# Allegro board Debug Board Layout.brd
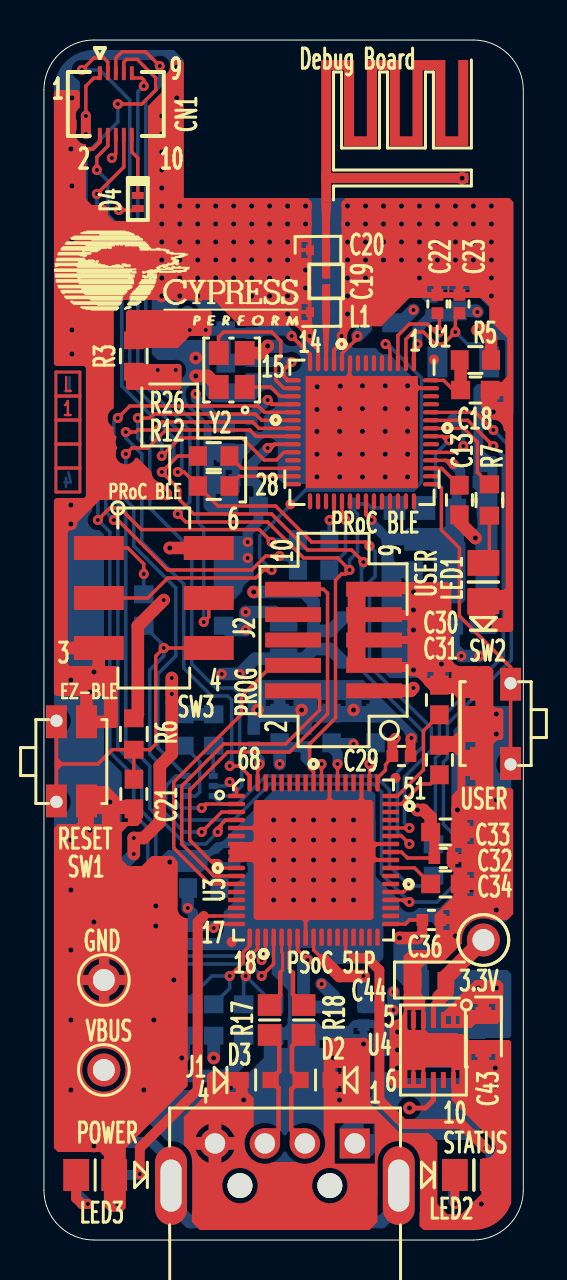
[diagram p0: board, top side]
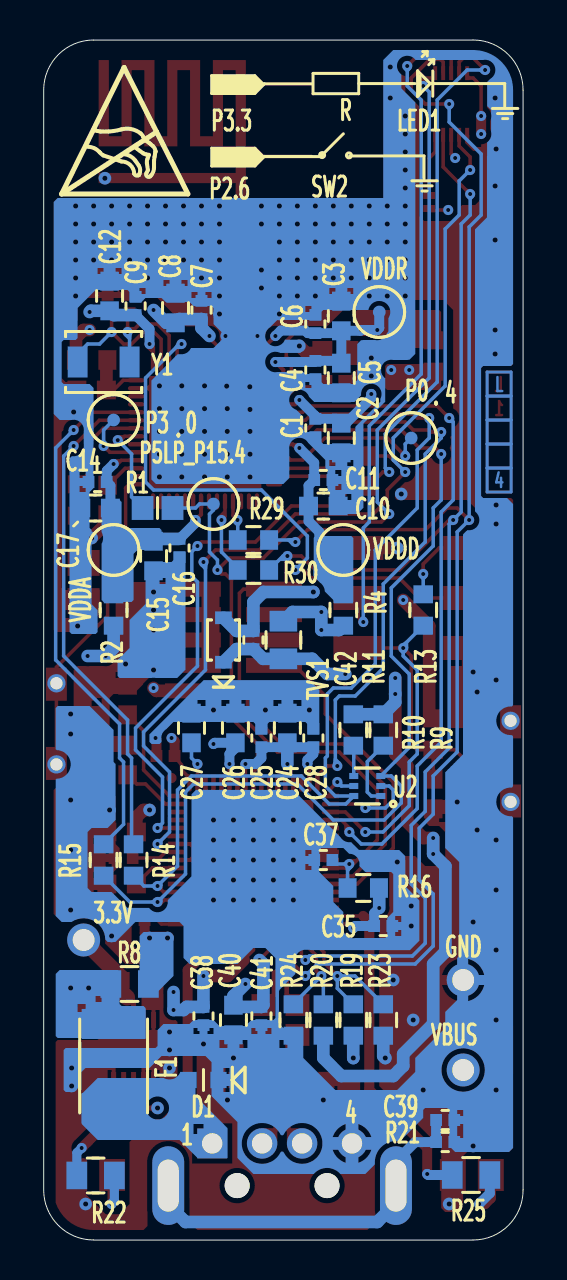
[diagram p1: board, bottom side, seen from below]

Outline 24 x 60 mm; copper layers: TOP, GND, POWER, BOTTOM. Coordinates in mm from the lower left corner of the outline.

## Design rules (mm)
net group DP1: nets DM_P DP_P
net group DP2: nets P5LP_DM P5LP_DP
net group POWER: nets GND_SIGNAL
nets with their own width: min track width 0.635; nets GND_EARTH1 P5LP_VCCD P5LP_VDD VBUS VCCD VDDA VDDD VDDR VREF VTARG

## Placement (name value [footprint] x y rotation side)
C1  0.1 uF  [CAPC1005X55N_0402_E]  10.4 40.6 270 bottom
C2  1.0 uF  [CAPC1608X90N_0603_E]  9.1 40.1 270 bottom
C3  1.0 uF  [CAPC1608X90N_0603_E]  9.1 46.2 90 bottom
C4  0.1 uF  [CAPC1005X55N_0402_E]  10.4 43.5 270 bottom
C5  1.0 uF  [CAPC1608X90N_0603_E]  9.1 43.1 270 bottom
C6  0.1 uF  [CAPC1005X55N_0402_E]  10.4 45.8 90 bottom
C7  0.1 uF  [CAPC1005X55N_0402_E]  16.1 46.5 90 bottom
C8  1.0 uF  [CAPC1608X90N_0603_E]  17.4 46.6 90 bottom
C9  0.1 uF  [CAPC1005X55N_0402_E]  19.4 46.7 90 bottom
C10  1.0 uF  [CAPC1608X90N_0603_E]  10 36.7 180 bottom
C11  0.1 uF  [CAPC1005X55N_0402_E]  10 38 180 bottom
C12  1.0 uF  [CAPC1608X90N_0603_E]  20.7 47.2 90 bottom
C13  1.0 uF  [CAPC1608X90N_0603_E]  20.8 37 270 top
C14  0.1 uF  [CAPC1005X55N_0402_E]  21.3 37.9 0 bottom
C15  1.0 uF  [CAPC1608X90N_0603_E]  18.5 34.2 270 bottom
C16  0.1 uF  [CAPC1005X55N_0402_E]  17.2 34.6 270 bottom
C17  1.0 uF  [CAPC1608X90N_0603_E]  21.4 36.6 0 bottom
C18  1.0 uF  [CAPC1608X90N_0603_E]  21.6 42.5 0 top
C19  1.2 pF  [L-0402-RF]  14.13 47.93 270 top
C20  1.2 pF  [C0402_RF_EDIT]  13.46 49.49 0 top
C21  100 pF  [CAPC1608X90N_0603_E]  4.5 22.3 270 top
C22  36 pF  [CAPC1005X55N_0402_E]  19.7 46.8 90 top
C23  18 pF  [CAPC1005X55N_0402_E]  20.8 46.8 90 top
C24  1.0 uF  [CAPC1608X90N_0603_E]  11.8 25.6 90 bottom
C25  0.1 uF  [CAPC1005X55N_0402_E]  13.1 25.1 90 bottom
C26  1.0 uF  [CAPC1608X90N_0603_E]  14.4 25.6 270 bottom
C27  1.0 uF  [CAPC1608X90N_0603_E]  16.6 25.6 270 bottom
C28  0.1 uF  [CAPC1005X55N_0402_E]  10.5 25.1 90 bottom
C29  0.1 uF  [CAPC1005X55N_0402_E]  17.9 24.2 0 top
C30  1.0 uF  [CAPC1608X90N_0603_E]  19.8 27 90 top
C31  1.0 uF  [CAPC1608X90N_0603_E]  19.8 24 90 top
C32  0.1 uF  [CAPC1005X55N_0402_E]  20 19.1 0 top
C33  1.0 uF  [CAPC1608X90N_0603_E]  20.1 20.4 0 top
C34  1.0 uF  [CAPC1608X90N_0603_E]  20.1 17.8 0 top
C35  0.1 uF  [CAPC1005X55N_0402_E]  7 15.7 180 bottom
C36  0.1 uF  [CAPC1005X55N_0402_E]  19.4 16 0 top
C37  0.1 uF  [CAPC1005X55N_0402_E]  10 19 0 bottom
C38  0.1 uF  [CAPC1005X55N_0402_E]  16 11.2 270 bottom
C39  0.01 uF  [CAPC1005X55N_0402_E]  3.9 6 180 bottom
C40  1.0 uF  [CAPC1608X90N_0603_E]  14.5 11 270 bottom
C41  0.1 uF  [CAPC1005X55N_0402_E]  13.1 11.2 270 bottom
C42  0.1 uF  [CAPC1005X55N_0402_E]  13.5 30 90 bottom
C43  10 uF  [CHIP_X1608_2_2]  22 10.4 270 top
C44  10 uF  [CHIP_X1608_2_2]  19.3 13 180 top
CN1  CON10A  [FLT_CONS_10_6PA]  3.6 56.8 0 top
D1  ESD 5VDC  [CR-LED0603]  16 8 180 bottom
D2  ESD 5VDC  [CR-LED0603]  13.6 8 0 top
D3  ESD 5VDC  [CR-LED0603]  10.6 8 180 top
D4  1SS417  [FLT_D0806_2_1PB]  4.7 51.9 270 top
F1  PTC Resettable Fuse  [FUSE_MF-MSMF050-2]  20.5 8.7 90 bottom
J1  USB A PLUG  [USB_A_90_PLUG_DIP]  12.06 0 0 top
J2  50MIL KEYED SMD  [FTSH-105-XX-X-DV-K]  14.5 30 90 top
L1  5.1nH  [C0402_RF_EDIT]  13.46 46.39 0 top
LED1  User LED Blue  [CR-LED0805]  22 32.9 90 top
LED2  Status LED Green  [CR-LED0805]  21.53 3.25 180 top
LED3  Power LED Red  [CR-LED0805]  2.56 3.25 180 top
NOREF  -  []  -251.18 -226.59 0 top
NOREF#2  -  []  0.4 45.6 0 top
NOREF#3  -  []  0 0 90 top
NOREF#4  -  []  0 0 0 top
NOREF#5  -  []  0 2.5 0 top
NOREF#6  -  [unnamed#2]  9.4 14.9 0 top
NOREF#7  -  []  180.62 -150.39 0 top
NOREF#8  -  []  16.8 52.3 0 top
NOREF#9  -  []  23.32 59.22 0 top
NOREF#10  -  [unnamed#2]  17.6 23.1 0 top
NOREF#11  -  [unnamed#2]  12.34 36.78 0 top
NOREF#12  -  [unnamed#2]  19.53 44.02 0 top
R1  Zero Ohm  [R-CR0603]  18.3 36.6 0 bottom
R2  Zero Ohm  [RESC1608X55N_0603_E]  20.5 31.5 270 bottom
R3  Zero Ohm  [RESC1608X55N_0603_E]  4.5 44.2 270 top
R4  Zero Ohm  [RESC1608X55N_0603_E]  9 31.5 270 bottom
R5  Zero Ohm  [RESC1608X55N_0603_E]  21.6 44 180 top
R6  4.7K  [RESC1608X55N_0603_E]  4.5 25.3 270 top
R7  820 ohm  [RESC1608X55N_0603_E]  22.3 37 270 top
R8  Zero Ohm  [RESC2012X70N_0805]  19.7 12.8 0 bottom
R9  2.2K  [RESC1608X55N_0603_E]  7 25.5 270 bottom
R10  2.2K  [RESC1608X55N_0603_E]  8.5 25.5 270 bottom
R11  Zero Ohm  [RESC2012X70N_0805]  12 30 90 bottom
R12  ZERO  [RESC1608X55N_0603_E]  8.5 37.7 0 top
R13  ZERO  [RESC1608X55N_0603_E]  5 31.5 90 bottom
R14  ZERO  [RESC1608X55N_0603_E]  19.5 19 90 bottom
R15  ZERO  [RESC1608X55N_0603_E]  21 19 90 bottom
R16  4.7K  [RESC1608X55N_0603_E]  8 17.6 0 bottom
R17  22E  [R-CR0603]  11.3 11 90 top
R18  22E  [R-CR0603]  13 11 90 top
R19  15K  [RESC1608X55N_0603_E]  8.5 11 90 bottom
R20  15K  [RESC1608X55N_0603_E]  10 11 90 bottom
R21  100K  [CAPC1005X55N_0402]  3.9 4.9 180 bottom
R22  820 ohm  [RESC2012X70N_0805]  21.4 3.23 180 bottom
R23  30K  [RESC1608X55N_0603_E]  7 11 270 bottom
R24  30K  [RESC1608X55N_0603_E]  11.5 11 270 bottom
R25  820 ohm  [RESC2012X70N_0805]  2.6 3.25 180 bottom
R26  ZERO  [RESC1608X55N_0603_E]  8.5 39.2 0 top
R29  ZERO  [RESC1608X55N_0603_E]  13.5 35 0 bottom
R30  ZERO  [RESC1608X55N_0603_E]  13.5 33.5 0 bottom
SW1  SW RA PUSH  [EVQ9P-SWITCH_1]  1.12 23.86 90 top
SW2  SW RA PUSH  [EVQ9P-SWITCH_1]  22.87 25.88 270 top
SW3  JS202011SCQN  [FLT_SW_6_4]  5.5 32.1 270 top
TP1  RED  [TP-43R_S]  20.5 41 180 bottom
TP2  RED  [TP-43R_S]  5.6 40.1 90 bottom
TP3  RED  [TP-43R_S]  20.5 34.5 180 bottom
TP4  RED  [TP-43R_S]  7.2 46.4 180 bottom
TP5  RED  [TP-43R_S]  9 34.5 180 bottom
TP6  VBUS  [TP-43-TH]  3 8.5 0 top
TP7  RED  [TP-43-TH]  3 13 0 top
TP8  RED  [TP-43-TH]  22 15 0 top
TP12  RED  [TP-43R_S]  15.5 36.8 90 bottom
TVS1  5V 350W  [SOD323]  15 30 90 bottom
U1  CYBL10162-56LQXI  [QFN40P700X700X60-57T570X570N]  15.92 40.39 180 top
U2  NTZD3152P  [SOT563]  7.8 22.7 0 bottom
U3  CY8C5868LTI-LP039 QFN68  [QFN68_8X8MM]  13.5 19 0 top
U4  MB39C022G  [SON_X_10_8TH]  19.5 9.5 180 top
Y1  32.768KHz  [Y-XTAL-CFS308]  21 43.9 0 bottom
Y2  24MHz  [ECX-2236-SMD_CRYSTAL-EDIT]  9.4 43.5 90 top

## Library data of the parts
C1 C4 C6 C7 C9 C11 C14 C16 C25 C28 C29 C32 C35-C38 C41 C42 = 0.1 uFd 0402: alternate symbols: (C-CC0402_A)
C2 C3 C5 C8 C10 C12 C13 C15 C17 C18 C21 C24 C26 C27 C30 C31 C33 C34 C40 = 1_0.0 uFd 0603 X5R 25V 10%: alternate symbols: (C-CC0603_A)
C19 C20 = CAP
C22 C23 = CAP NP
C39 = 0_0.01 uFd 0402 X7R
C43 C44 = GRM188
CN1 = DF40HC2_5-10DS-0_4V_PA
D1-D3 = ESD 5VDC 0603
D4 = 1SS417_FSC_PB
F1 = FUSE
J1 = USB A SMT Plug
J2 = 10 Pin Header 50mil Keyed SMD
L1 = INDUCTOR
LED1-LED3 = LED Green 0805
R1-R5 R8 R11 = 330 ohm 5% 0805_1
R6 R16 = 4.7K ohm 5% 0603: alternate symbols: (R-CR0603_A)
R7 R22 R25 = 330 ohm 5% 0805_0
R9 R10 = 2_0.2K ohm 5% 0603: alternate symbols: (R-CR0603_A)
R12-R15 R26 R29 R30 = Zero ohm 0603_2: alternate symbols: (R-CR0603_A)
R17 R18 = 24 ohm 5% 0603 _0
R19 R20 R23 R24 = RESISTOR
R21 = 100K ohm 5% 0402: alternate symbols: (R-CR0402_A)
SW1 SW2 = Switch RA Pushbutton_0
SW3 = JS202011SCQN
TP1-TP8 TP12 = TEST_POINT
TVS1 = TVS 5V SOD-323_0
U1 = PSoC_BLE_2
U2 = FET DUAL P-CH 20V 430mA SOT-563
U3 = CY8C5667LTI-LP008 QFN68
U4 = MB39C022G
Y1 = 32_0.768KHz XTAL_5P
Y2 = ZTA_14

## Footprints (pads in the part's own frame, mm; a bottom-side part is the same pattern mirrored in y, then rotated)
C0402_RF_EDIT
  rect 0.406x0.5 smd: 1(-0.145,0) 2(0.664,0)
CAPC1005X55N_0402
  rect 0.59x0.6 smd: 1(-0.455,0) 2(0.455,0)
CAPC1005X55N_0402_E
  rect 0.59x0.6 smd: 1(-0.455,0) 2(0.455,0)
CAPC1608X90N_0603_E
  rect 0.95x0.93 smd: 1(-0.74,0) 2(0.74,0)
CHIP_X1608_2_2
  rect 0.85x0.8 smd: 1(-0.825,0) 2(0.825,0)
CR-LED0603
  rect 0.813x0.813 smd: 1(-0.749,0) 2(0.749,0)
CR-LED0805
  rect 1.295x1.6 smd: 1(-0.952,0) 2(0.952,0)
ECX-2236-SMD_CRYSTAL-EDIT
  rect 1.2x1 smd: 1(-0.85,-0.65) 2(0.85,-0.65) 3(0.85,0.65) 4(-0.85,0.65)
EVQ9P-SWITCH_1
  round 0.914 hole 0.61: (-1.953,0.492) (2.103,0.492)
  rect 1.65x1.05 smd: 1(2.055,0.492) 2(2.055,-1.016) 3(-1.905,0.492) 4(-1.905,-1.016)
FLT_CONS_10_6PA
  rect 0.2x0.7 smd: 1(-0.8,1.54) 2(-0.8,-1.54) 3(-0.4,1.54) 4(-0.4,-1.54) 5(0,1.54) 6(0,-1.54) 7(0.4,1.54) 8(0.4,-1.54) 9(0.8,1.54) 10(0.8,-1.54)
FLT_D0806_2_1PB
  rect 0.35x0.6 smd: 1(-0.425,0) 2(0.425,0)
FLT_SW_6_4
  rect 1.2x2.5 smd: 1(-2.5,-2.75) 2(0,-2.75) 3(2.5,-2.75) 4(-2.5,2.75) 5(0,2.75) 6(2.5,2.75)
FTSH-105-XX-X-DV-K
  rect 0.749x2.799 smd: 1(-2.54,-2.029) 2(-2.54,2.029) 3(-1.27,-2.029) 4(-1.27,2.029) 5(0,-2.029) 6(0,2.029) 7(1.27,-2.029) 8(1.27,2.029) 9(2.54,-2.029) 10(2.54,2.029)
FUSE_MF-MSMF050-2
  rect 1.501x3.2 smd: 1(-2.101,0) 2(2.101,0)
L-0402-RF
  rect 0.5x0.406 smd: 1(-0.4,0) 2(0.4,0)
QFN40P700X700X60-57T570X570N
  oval 0.22x0.81 smd: 1(-2.6,-3.455) 2(-2.2,-3.455) 3(-1.8,-3.455) 4(-1.4,-3.455) 5(-1,-3.455) 6(-0.6,-3.455) 7(-0.2,-3.455) 8(0.2,-3.455) 9(0.6,-3.455) 10(1,-3.455) 11(1.4,-3.455) 12(1.8,-3.455) 13(2.2,-3.455) 14(2.6,-3.455) 29(2.6,3.455) 30(2.2,3.455) 31(1.8,3.455) 32(1.4,3.455) 33(1,3.455) 34(0.6,3.455) 35(0.2,3.455) 36(-0.2,3.455) 37(-0.6,3.455) 38(-1,3.455) 39(-1.4,3.455) 40(-1.8,3.455) 41(-2.2,3.455) 42(-2.6,3.455)
  oval 0.81x0.22 smd: 15(3.455,-2.6) 16(3.455,-2.2) 17(3.455,-1.8) 18(3.455,-1.4) 19(3.455,-1) 20(3.455,-0.6) 21(3.455,-0.2) 22(3.455,0.2) 23(3.455,0.6) 24(3.455,1) 25(3.455,1.4) 26(3.455,1.8) 27(3.455,2.2) 28(3.455,2.6) 43(-3.455,2.6) 44(-3.455,2.2) 45(-3.455,1.8) 46(-3.455,1.4) 47(-3.455,1) 48(-3.455,0.6) 49(-3.455,0.2) 50(-3.455,-0.2) 51(-3.455,-0.6) 52(-3.455,-1) 53(-3.455,-1.4) 54(-3.455,-1.8) 55(-3.455,-2.2) 56(-3.455,-2.6)
  rect 5.6x5.6 smd: 57(0,0)
QFN68_8X8MM
  custom 0.865x0.229 smd: 1(-3.851,3.2) 2(-3.851,2.799) 3(-3.851,2.4) 4(-3.851,1.999) 5(-3.851,1.6) 6(-3.851,1.199) 7(-3.851,0.8) 8(-3.851,0.399) 9(-3.851,0) 10(-3.851,-0.399) 11(-3.851,-0.8) 12(-3.851,-1.199) 13(-3.851,-1.6) 14(-3.851,-1.999) 15(-3.851,-2.4) 16(-3.851,-2.799) 17(-3.851,-3.2) 35(3.851,-3.2) 36(3.851,-2.799) 37(3.851,-2.4) 38(3.851,-1.999) 39(3.851,-1.6) 40(3.851,-1.199) 41(3.851,-0.8) 42(3.851,-0.399) 43(3.851,0) 44(3.851,0.399) 45(3.851,0.8) 46(3.851,1.199) 47(3.851,1.6) 48(3.851,1.999) 49(3.851,2.4) 50(3.851,2.799) 51(3.851,3.2)
  custom 0.229x0.865 smd: 18(-3.2,-3.851) 19(-2.799,-3.851) 20(-2.4,-3.851) 21(-1.999,-3.851) 22(-1.6,-3.851) 23(-1.199,-3.851) 24(-0.8,-3.851) 25(-0.399,-3.851) 26(0,-3.851) 27(0.399,-3.851) 28(0.8,-3.851) 29(1.199,-3.851) 30(1.6,-3.851) 31(1.999,-3.851) 32(2.4,-3.851) 33(2.799,-3.851) 34(3.2,-3.851) 52(3.2,3.851) 53(2.799,3.851) 54(2.4,3.851) 55(1.999,3.851) 56(1.6,3.851) 57(1.199,3.851) 58(0.8,3.851) 59(0.399,3.851) 60(0,3.851) 61(-0.399,3.851) 62(-0.8,3.851) 63(-1.199,3.851) 64(-1.6,3.851) 65(-1.999,3.851) 66(-2.4,3.851) 67(-2.799,3.851) 68(-3.2,3.851)
  rect 5.601x5.601 smd: 69(0,0)
R-CR0603
  rect 1.092x1.194 smd: 1(-0.749,0) 2(0.749,0)
RESC1608X55N_0603_E
  rect 0.9x0.98 smd: 1(-0.785,0) 2(0.785,0)
RESC2012X70N_0805
  rect 1.04x1.38 smd: 1(-0.94,0) 2(0.94,0)
SOD323
  rect 0.635x0.838 smd: 1(-1.112,0) 2(1.112,0)
SON_X_10_8TH
  rect 0.25x0.8 smd: 1(-1,-1.5) 2(-0.5,-1.5) 3(0,-1.5) 4(0.5,-1.5) 5(1,-1.5) 6(1,1.5) 7(0.5,1.5) 8(0,1.5) 9(-0.5,1.5) 10(-1,1.5)
  rect 2.4x1.7 smd: 11(0,0)
SOT563
  rect 0.457x0.305 smd: 1(-0.676,0.5) 2(-0.676,0) 3(-0.676,-0.5) 4(0.676,-0.5) 5(0.676,0) 6(0.676,0.5)
TP-43-TH
  round 1.651 hole 1.092: 1(0,0)
TP-43R_S
  round 0.635 smd: 1(0,0)
unnamed#2
  round 0.508 smd: (0,0)
USB_A_90_PLUG_DIP
  round 1.25 hole 1.25 unplated: (-2.25,2.72) (2.25,2.72)
  rect 1.5x1.5 hole 1.016: 1(3.5,4.829)
  round 1.524 hole 1.016: 2(1.001,4.829) 3(-1.001,4.829) 4(-3.5,4.829)
  oval 1.6x3.937 hole 1.05x2.6: 5(-5.7,2.72) 6(5.7,2.72)
Y-XTAL-CFS308
  rect 1x1.55 smd: 1(-1.3,0) 2(1.3,0)

## Nets
GND_EARTH1: C39.1 J1.5(S1) J1.6(S2) R21.1
GND_SIGNAL: C1.2 C2.2 C3.2 C4.2 C5.2 C6.2 C7.2 C8.2 C9.2 C10.2 C11.2 C12.2 C13.2 C14.2 C15.2 C16.2 C17.2 C18.2 C19.1 C20.1 C20.2 C21.2 C22.2 C23.2 C24.2 C25.2 C26.1 C27.1 C28.2 C29.2 C30.2 C31.2 C32.2 C33.2 C34.2 C35.2 C36.2 C37.2 C38.2 C39.2 C40.2 C41.2 C42.2 C43.2 C44.2 CN1.2 D1.2(ANODE) D2.2(ANODE) D3.2(ANODE) J1.4(GND) J2.3 J2.5 J2.7 J2.9 L1.1 LED1.1(K) LED2.1(K) LED3.1(K) R21.2 R23.2 R24.2 SW1.2 SW1.4 SW2.2 SW2.4 SW3.3 SW3.4 TP7.1 TVS1.2(A) U1.9(VSSD) U1.11(GANT1) U1.13(GANT2) U1.55(VSSA) U1.57(EPAD) U3.5(VSSB) U3.7(VBOOST) U3.8(VBAT) U3.9(VSSD#9) U3.25(VSSD#25) U3.43(VSSA) U3.45(VSSD#45) U3.54(P0_5) U3.58(VSSD#58) U3.69(EPAD) U4.4 U4.5 U4.6 U4.7 U4.10 U4.11 Y2.2 Y2.4
VBUS: C43.1 F1.2 R8.2 R19.1 TP6.1 U4.1 U4.2 U4.8
VCCD: C18.1 R5.2 U1.56(VCCD)
VDDA: C14.1 C15.1 C16.1 C17.1 R2.1 TP3.1 U1.36(VDDA#36) U1.46(VDDA#46)
VDDD: C9.1 C10.1 C11.1 C12.1 R4.1 R5.1 R6.1 TP5.1 U1.1(VDDD#1) U1.23(VDDD#23)
VDDR: C1.1 C2.1 C3.1 C4.1 C5.1 C6.1 C7.1 C8.1 R3.1 TP4.1 U1.10(VDDR#10) U1.14(VDDR#14) U1.15(VDDR#15) U1.18(VDDR#18)
BLE_BIND: SW2.1 SW2.3 U1.43(P2.6)
BLE_P3_2: R1.2 U1.49(P3.2)
BLE_RX: R29.2 U1.32(P1.4)
BLE_STATUS: R7.1 U1.50(P3.3)
BLE_TEST1: TP1.1 U1.47(P3.0)
BLE_TEST2: TP2.1 U1.24(P0.4)
BLE_TX: R30.2 U1.33(P1.5)
BLE_XRES: SW3.2 U1.4(XRES)
DM_P: R18.2 U3.23(P15_7 DM)
DP_P: R17.2 U3.22(P15_6 DP)
EXTRA: CN1.9 R1.1 TP12.1 U3.60(P15_4)
EZ_VDD: C44.1 CN1.1 CN1.6 D4.2 R2.2 R3.2 R4.2 R11.2 TP8.1 U4.3
EZ_XRES: CN1.5 SW3.5
P5LP0_0: U3.48(P0_0)
P5LP0_1: U3.49(P0_1)
P5LP0_2: C31.1 U3.50(P0_2)
P5LP0_3: C30.1 U3.51(P0_3)
P5LP0_4: C27.2 U3.53(P0_4)
P5LP1_2: U3.13(P1_2)
P5LP1_6: R19.2 R23.1 U3.18(P1_6)
P5LP1_7: R20.2 R24.1 U3.19(P1_7)
P5LP2_5: U1.21(P0.2) U3.68(P2_5)
P5LP2_6: U2.5(G2) U3.1(P2_6)
P5LP2_7: U2.2(G1) U3.2(P2_7)
P5LP3_0: U3.29(P3_0)
P5LP3_1: R22.1 U3.30(P3_1)
P5LP3_4: U3.33(P3_4)
P5LP3_5: U3.34(P3_5)
P5LP3_6: U3.36(P3_6)
P5LP3_7: U3.37(P3_7)
P5LP12_0: R15.1 U1.22(P0.3) U2.3(D2) U3.38(SIO, I2C1_SCL P12_0)
P5LP12_1: R14.1 U1.20(P0.1) U2.6(D1) U3.39(SIO, I2C1_SDA P12_1)
P5LP12_2: CN1.4 R26.1 U3.46(SIO_P12_2)
P5LP12_3: CN1.3 R12.1 U3.47(SIO_P12_3)
P5LP12_4: C21.1 R6.2 R13.1 SW1.1 SW1.3 SW3.6 U3.3(P12_4 I2C0_SCL, SIO)
P5LP12_5: U1.19(P0.0) U3.4(P12_5 I2C0_SDA, SIO)
P5LP12_6: CN1.8 R30.1 U3.20(P12_6_SIO)
P5LP12_7: CN1.7 R29.1 U3.21(P12_7_SIO)
P5LP_DM: D2.1(CATHODE) J1.2(DM) R18.1
P5LP_DP: D3.1(CATHODE) J1.3(DP) R17.1
P5LP_POWER: R25.1 U3.16(P1_5)
P5LP_SWDCLK: J2.4 U3.12(P1_1)
P5LP_SWDIO: J2.2 U3.11(P1_0)
P5LP_SWO: U3.14(P1_3)
P5LP_VCCD: C26.2 C38.1 U3.26(VCCD#26) U3.57(VCCD#57)
P5LP_VDD: C24.1 C25.1 C28.1 C29.1 C32.1 C33.1 C35.1 C36.1 C40.1 C41.1 R8.1 R16.1 U3.17(VDDIO1) U3.24(VDDD#24) U3.35(VDDIO3) U3.44(VDDA) U3.52(VDDIO0) U3.59(VDDD#59) U3.67(VDDIO2)
P5LP_XRES: C37.1 J2.10 R16.2 U3.10(XRES)
SCL: R15.2 U1.52(P3.5)
SDA: R14.2 U1.51(P3.4)
SWDCLK: R12.2 U1.27(P0.7)
SWDIO: R26.2 U1.26(P0.6)
VREF: C13.1 U1.45(VREF)
VTARG: C42.1 J2.1 R9.1 R10.1 R11.1 R20.1 TVS1.1(K)
XRES: R13.2 SW3.1
XTAL24I: U1.16(XTAL24I) Y2.3
XTAL24O: U1.17(XTAL24O) Y2.1
XTAL32I: C22.1 U1.3(XTAL32I/P6.1) Y1.1
XTAL32O: C23.1 U1.2(XTAL32O/P6.0) Y1.2
N16838351: LED1.2(A) R7.2
N16850094: LED2.2(A) R22.2
N16851895: D1.1(CATHODE) F1.1 J1.1(VBUS)
N16852479: LED3.2(A) R25.2
N16886366: C34.1 U3.42(VCCA)
N16934357: C19.2 L1.2 U1.12(ANT)
N16992889: CN1.10 D4.1
N168501551: R9.2 U2.1(S1)
N168501631: R10.2 U2.4(S2)

Pads without a net: J2 6 8; U1 5 6 7 8 25 28 29 30 31 34 35 37 38 39 40 41 42 44 48 53 54; U3 6 15 27 28 31 32 40 41 55 56 61 62 63 64 65 66; U4 9

## Via types
v1: diameter 0.508, hole 0.203, TOP to BOTTOM, 103 vias
v2: diameter 0.635, hole 0.254, TOP to BOTTOM, 221 vias

## Routing (per net, layer and track width the routed paths; a pad name or vN(x,y) marks a point on that pad's centre or on a via; arc(x,y) is an arc through that point)
GND_EARTH1: length 18.7
  BOTTOM w0.5: 4.36,6 4.36,4.9 5.41,4.89
  BOTTOM w0.508: J1.5 6.36,3.94 5.41,4.89
  BOTTOM w0.635: J1.5 6.36,1.83 7.3,0.9 16.9,0.9 17.76,1.76 J1.6
GND_SIGNAL: length 28
  TOP w0.2: CN1.2 2.8,54.9 2.45,54.55 v2(1.35,54.55) ; 13.57,44.66 13.3,44.94 v1(13.3,45.2) ; 14.52,43.94 U1.11 ; 13.72,43.94 U1.13 ; 14.66,44.64 14.9,44.87 v1(14.9,45.2)
  TOP w0.203: 13.57,44.66 13.72,44.52 13.72,43.94 ; 14.52,43.94 14.52,44.5 14.66,44.64
  TOP w0.5: v1(18.4,25.1) 18.36,25.05 18.36,24.2
  TOP w0.635: v2(21.6,35.1) 20.8,35.9 C13.2 ; Y2.2 10.85,44.35 v2(11.2,44.7) ; SW3.4 v2(6.3,34.6) ; C18.2 22.34,41.56 v2(22.5,41.4) ; Y2.4 8.2,43.2 v2(7.6,43.2) ; 1.1,29.6 SW3.3 2.75,28.65 v2(2.5,28.4) ; v2(2.3,27.4) 2.13,27.23 SW1.2 3.21,25.91 3.3,26 ; LED3.1 3.52,1.98 v2(3.7,1.8)
  BOTTOM w0.635: v2(6.9,9.1) 7,9.2 R23.2 ; TVS1.2 14.34,30.45 C42.2 13.5,31.9 13,32.4 v2(10.5,32.4)
  vias: v2(1.4,57.1) v2(1.4,52.7) v2(1.4,50) v2(1.4,45.5) v2(1.4,44.3) v2(1.35,36.75) v2(1.35,35.8) v2(1.35,28) v2(1.35,20) v2(1.35,17.5) v2(1.35,14.5) v2(1.35,11) v2(1.35,7.5) v2(2.3,20.5) v2(2.5,15.9) v2(2.5,4.7) v2(3.3,21.9) v2(5,7.5) v2(5.5,11) v2(5.6,16.7) v2(5.6,15.7) v2(5.9,56.2) v2(5.9,55.3) v2(5.9,54.4) v2(5.9,53.5) v2(5.9,52.6) v2(5.9,51.7) v2(5.9,50.8) v2(5.9,49.9) v2(5.9,49) v2(5.9,48.1) v2(5.9,47.2) v2(6.1,37.3) v2(6.3,18.9) v2(6.5,13) v2(6.65,58.65) v2(6.65,57.1) v2(6.8,51.7) v2(6.8,50.8) v2(6.8,49.9) v2(6.8,49) v2(6.8,48.1) v2(6.8,47.2) v2(7.6,44.1) v2(7.7,51.7) v2(7.7,50.8) v2(7.7,49.9) v2(7.7,49) v2(7.7,48.1) v2(7.7,47.2) v2(8.6,51.7) v2(8.6,50.8) v2(8.6,49.9) v2(8.6,49) v2(8.6,48.1) v2(9.5,51.7) v2(9.5,50.8) v2(9.5,49.9) v2(9.5,49) v2(9.5,48.1) v2(10,7) v2(10.4,51.7) v2(10.4,50.8) v2(10.4,49.9) v2(10.4,49) v2(10.4,48.1) v2(10.4,47.2) v2(10.7,26.5) v2(11.3,51.7) v2(11.3,50.8) v2(11.3,49.9) v2(11.3,49) v2(11.3,48.1) v2(11.3,47.2) v2(11.5,21) v2(11.5,20) v2(11.5,19) v2(11.5,18) v2(11.5,17) v2(12.2,51.7) v2(12.2,50.8) v2(12.2,49.9) v2(12.2,49) v2(12.2,48.1) v2(12.2,47.2) v2(12.2,46.3) v2(12.5,21) v2(12.5,20) v2(12.5,19) v2(12.5,18) v2(12.5,17) v2(12.9,26.5) v2(13.1,51.7) v2(13.1,50.8) v2(13.1,48.5) v2(13.1,47.6) v2(13.5,21) v2(13.5,20) v2(13.5,19) v2(13.5,18) v2(13.5,17) v2(13.68,42.66) v2(13.67,41.53) v2(13.67,40.43) v2(13.67,39.29) v2(13.67,38.15) v2(14.5,21) v2(14.5,20) v2(14.5,19) v2(14.5,18) v2(14.5,17) v2(14.5,9.1) v2(14.84,42.69) v2(14.81,41.57) v2(14.81,40.43) v2(14.81,39.29) v2(14.81,38.15) v2(14.8,7) v2(15.2,51.7) v2(15.2,50.8) v2(15.2,49.9) v2(15.2,49) v2(15.2,48.1) v2(15.2,47.2) v2(15.2,46.3) v2(15.5,26.5) v2(15.5,21) v2(15.5,20) v2(15.5,19) v2(15.5,18) v2(15.5,17) v2(15.95,42.71) v2(15.95,41.57) v2(15.95,40.43) v2(15.95,39.29) v2(15.95,38.15) v2(16,9.8) v2(16.1,51.7) v2(16.1,50.8) v2(16.1,49.9) v2(16.1,49) v2(16.1,48.1) v2(17,51.7) v2(17,50.8) v2(17,49.9) v2(17,49) v2(17.09,42.71) v2(17.09,41.57) v2(17.09,40.43) v2(17.09,39.29) v2(17.09,38.15) v2(17.7,10.4) v2(17.7,9.5) v2(17.7,8.6) v2(17.9,51.7) v2(17.9,50.8) v2(17.9,49.9) v2(17.9,49) v2(18.21,42.71) v2(18.21,41.57) v2(18.21,40.43) v2(18.21,39.29) v2(18.21,38.15) v2(18.5,32.4) v2(18.5,31.5) v2(18.5,30.5) v2(18.5,28.5) v2(18.8,51.7) v2(18.8,50.8) v2(18.8,49.9) v2(18.8,49) v2(18.8,48.1) v2(19.7,51.7) v2(19.7,50.8) v2(19.7,49.9) v2(19.7,49) v2(19.9,28.8) v2(20.6,51.7) v2(20.6,50.8) v2(20.6,49.9) v2(20.6,49) v2(20.6,15.2) v2(20.7,21.5) v2(20.94,53.09) v2(21.5,51.7) v2(21.5,50.8) v2(21.5,49.9) v2(21.5,49) v2(21.9,1.8) v2(22.3,30.7) v2(22.4,51.7) v2(22.4,50.8) v2(22.4,49.9) v2(22.4,49) v2(22.4,48.1) v2(22.4,47.2) v2(22.65,26.3) v2(22.65,25.3) v2(22.65,16.5) v2(22.6,8.6) v2(22.6,7.7) v2(22.65,22) v2(22.65,19.5)
VBUS: length 3.5
  TOP w0.25: v2(18.3,6.6) 19.1,6.6 19.5,7 U4.8
  BOTTOM w0.635: R19.1 v2(8.5,9.1)
  vias: v2(21.75,12.6) v2(22.65,12.6)
VCCD: length 3.2
  TOP w0.178: C18.1 20.5,42.5 20.01,42.99 19.38,42.99
  TOP w0.635: C18.1 20.86,43.95 R5.2
VDDA: length 7.3
  TOP w0.178: 19.38,38.99 20.11,38.99 20.3,38.8 v1(20.5,38.8)
  TOP w0.203: U1.36 16.12,36.28 v1(16.4,36)
  BOTTOM w0.5: C17.1 20.66,37.72 20.84,37.9 20.84,38.45 v1(20.5,38.8) ; C16.1 16.4,35.85 v1(16.4,36)
  BOTTOM w0.635: C16.1 18.39,35.05 C15.1
VDDD: length 20.4
  TOP w0.2: U1.23 11.54,39.79 11.35,39.6 v1(11.2,39.6)
  TOP w0.203: U1.1 18.52,44.62 v1(18.7,44.8)
  TOP w0.635: v1(21.7,45.5) 22,45.5 22.39,45.12 R5.1 ; v1(6,32) 4.7,30.7 4.7,26.29 R6.1
  BOTTOM w0.5: v1(11.2,39.6) 10.46,38.85 C11.1 10.74,37.72 C10.1 10.74,35.94 10.2,35.4 v1(10.2,34.9) ; 19.4,46.24 18.7,45.55 v1(18.7,44.8)
  BOTTOM w0.635: 19.4,46.24 20.48,46.24 C12.1 21.64,46.46 v1(21.7,46.4)
  vias: v1(10.2,34.1)
VDDR: length 26.1
  TOP w0.178: v1(15.7,45.2) 15.7,45.1 14.92,44.32 U1.10
  TOP w0.2: U1.15 12.21,42.99 12,43.2 12,43.5 v1(12.4,43.9)
  TOP w0.203: U1.18 11.41,41.79 v1(11.2,42) ; U1.14 13.32,44.28 v1(12.4,45.2)
  BOTTOM w0.5: v1(7.6,42.3) 7.6,42.1 8.86,40.84 C2.1 9.31,41.05 C1.1 10.4,41.2 v1(11.2,42) ; v1(12.4,43.9) 10.46,43.9 C4.1 9.21,43.95 C5.1 C3.1 ; C3.1 8.14,45.46 v1(8.1,45.5) v1(7.3,45.5) 7.2,45.6 TP4.1 ; C3.1 9.21,45.34 C6.1 10.78,45.34 10.9,45.47 12.13,45.47 v1(12.4,45.2)
  BOTTOM w0.635: v1(15.7,45.2) 16.1,45.6 C7.1 17.21,46.05 C8.1 17.86,45.86 v1(18.5,46.5)
BLE_BIND: length 15.8
  TOP w0.178: 19.38,37.79 19.71,37.79 19.9,37.6 19.9,35.5 20.8,34.6 20.8,31.2 23.36,28.64 SW2.3 SW2.1
BLE_P3_2: length 4.9
  TOP w0.178: 19.38,40.19 19.95,40.19 20.14,39.99 v1(20.29,39.99)
  BOTTOM w0.178: v1(20.29,39.99) 19.6,39.3 19.6,37.15 R1.2
BLE_RX: length 2
  TOP w0.178: U1.32 14.52,36.22 v1(14.3,36)
  BOTTOM w0.178: R29.2 14.29,35.98 v1(14.3,36)
BLE_STATUS: length 5
  TOP w0.178: R7.1 21.7,38.38 21.7,39.9 21.01,40.59 19.38,40.59
BLE_TEST1: length 3.3
  TOP w0.178: v1(21,39.7) 20.69,39.39 19.38,39.39
  BOTTOM w0.178: TP1.1 21,40.5 v1(21,39.7)
BLE_TEST2: length 8.6
  TOP w0.178: v1(5.9,39.2) 6.8,40.1 9.93,40.1 11.03,39 11.64,39 12.02,39.39 U1.24
  BOTTOM w0.178: v1(5.9,39.2) 5.9,39.8 TP2.1
BLE_TX: length 3.8
  TOP w0.178: v1(15.1,36) 14.92,36.18 U1.33
  BOTTOM w0.178: R30.2 14.29,33.59 15.1,34.4 v1(15.1,36)
BLE_XRES: length 29.2
  TOP w0.178: U1.4 17.32,44.58 v1(17.1,44.8) ; v1(11.4,33.5) 11,33.5 10.6,33.1 6.2,33.1 5.2,32.1 SW3.2
  BOTTOM w0.178: v1(11.4,33.5) 10.8,34.1 10.8,35.2 13.1,37.5 18.5,37.5 18.9,37.9 18.9,43.1 17.2,44.8 v1(17.1,44.8)
DM_P: length 3.7
  TOP w0.152: 12.47,13.38 12.25,13.59 12.25,14.36 12.3,14.4 U3.23
  TOP w0.229: R18.2 12.47,12.28 12.47,13.38
DP_P: length 3.7
  TOP w0.152: 11.83,13.38 11.95,13.49 11.95,14.36 11.9,14.4 U3.22
  TOP w0.229: 11.83,13.38 11.83,12.28 R17.2
EXTRA: length 51.1
  TOP w0.178: CN1.9 4.4,58.2 4.5,58.1 4.9,58.1 5,58 v1(5,57.7) ; v1(6.7,36.3) 7.1,35.9 11.2,35.9 13,34.1 14.7,34.1 v1(15.3,33.5) 15.1,33.3 14.9,33.3 14.6,33 14.6,26.1 13.3,24.8 13.3,23.6 13.5,23.4 U3.60
  BOTTOM w0.178: v1(5,57.7) 4.7,57.4 4.7,43.1 7.3,40.5 7.3,36.9 v1(6.7,36.3) ; v1(15.3,33.5) 15.3,34 15.7,34.4 15.7,36.3 15.5,36.5 TP12.1 16.2,36.8 16.4,36.6 R1.1
EZ_VDD: length 82.3
  TOP w0.178: v1(2.1,56.2) 2.1,57.7 2.5,58.1 2.7,58.1 2.8,58.2 CN1.1 ; CN1.6 3.6,54.3 v1(3.4,54.1) ; v1(3.75,51.5) 4.3,51.5 4.33,51.48 D4.2
  TOP w0.25: U4.3 19.5,11.8 19.82,12.12
  TOP w0.5: v1(2.1,55.3) v1(2.1,56.2)
  TOP w0.8: 19.82,12.12 20.12,12.43 C44.1 20.12,13.12 TP8.1
  POWER w0.8: 2.7,43.5 v1(5.7,43.5) v1(6.6,43.5) ; 2.7,43.5 2.7,50.45 v1(3.75,51.5) 3.75,53.75 v1(3.4,54.1) 2.2,55.3 v1(2.1,55.3) v1(2.1,56.2) ; 2.7,43.5 2.7,38.7 4.5,36.9 4.5,34.7 4,34.2 4,32.4 5.9,30.5 6.5,30.5 7,30 8.4,30 8.9,30.5 v1(10.1,30.5) ; v1(10.1,30.5) 16.9,30.5 17.9,29.5 19,29.5 19.3,29.8 20.3,29.8 v1(20.9,29.2) v1(21.8,29.2) 21.8,28 21.7,27.9 21.7,15.3 TP8.1 ; v1(10.1,30.5) v1(10.1,31.4)
  BOTTOM w0.635: v1(21.8,29.2) v1(20.9,29.2) 20.5,29.6 R2.2 ; R4.2 9.21,30.5 v1(10.1,30.5) v1(10.1,31.4) 11.54,31.4 R11.2
EZ_XRES: length 34
  TOP w0.178: v1(5.8,58.7) 5.09,59.41 3.91,59.41 3.6,59.1 CN1.5 ; v1(8,30.9) 8.25,31.15 SW3.5
  BOTTOM w0.178: v1(5.8,58.7) 5.8,57.7 5.1,57 5.1,43.3 7.7,40.7 7.7,35.9 8,35.6 v1(8,30.9)
P5LP0_2: length 3.1
  TOP w0.178: C31.1 19.34,22.8 18.9,22.8 17.9,21.8 U3.50
P5LP0_3: length 5.3
  TOP w0.178: C30.1 19,25.46 19,23.5 17.7,22.2 U3.51
P5LP0_4: length 2.1
  TOP w0.178: U3.53 v1(16.3,23.8)
  BOTTOM w0.178: v1(16.3,23.8) 16.6,24.1 C27.2
P5LP1_6: length 7
  TOP w0.178: v1(9.3,13.2) 9.97,13.87 9.97,14.39 10.3,14.71 U3.18
  BOTTOM w0.178: R23.1 8.41,13.2 v1(9.3,13.2) 9.3,12.59 R19.2
P5LP1_7: length 5.6
  TOP w0.178: v1(10.1,13.2) 10.35,13.45 10.35,14.23 10.7,14.57 U3.19
  BOTTOM w0.178: R20.2 10,13.1 v1(10.1,13.2) 11.5,11.8 R24.1
P5LP2_5: length 29.7
  TOP w0.178: U1.21 10.76,40.59 10.45,40.9 5.9,40.9 5.5,40.5 4.7,40.5 4.6,40.4 v1(4.1,40.4) ; U3.68 10.3,23.2 9.8,23.7 v1(9.3,23.7)
  BOTTOM w0.178: v1(4.1,40.4) 4.1,40.1 4.9,39.3 4.9,34.9 7,32.8 7,28.6 8.4,27.2 9.2,27.2 9.4,27 9.4,23.8 v1(9.3,23.7)
P5LP2_6: length 1.8
  TOP w0.178: U3.1 9.65,22.55 v1(9.3,22.9)
  BOTTOM w0.178: U2.5 9.1,22.7 v1(9.3,22.9)
P5LP2_7: length 4.6
  TOP w0.178: v1(7.9,21.6) 8.1,21.8 U3.2
  BOTTOM w0.178: v1(7.9,21.6) 6.89,21.6 6.5,21.99 6.5,22.5 6.7,22.7 U2.2
P5LP3_1: length 17
  TOP w0.178: 15.5,14.1 15.1,14.5 U3.30
  TOP w0.5: v1(22.1,4.6) 20.9,5.8 18,5.8 16.79,7.01 16.79,13.5 16.19,14.1 15.5,14.1
  BOTTOM w0.457: v1(22.1,4.6) 22.34,4.36 R22.1
P5LP12_0: length 51.6
  TOP w0.178: U3.38 18.2,17 v1(18.3,16.9) ; v1(4.1,39.3) 4.4,39.6 5.2,39.6 6.1,40.5 10.31,40.5 10.62,40.19 U1.22
  BOTTOM w0.178: v1(4.1,39.3) 4.1,37 4.5,36.6 4.5,34.7 6.6,32.6 6.6,29.2 5.7,28.3 5.7,24.62 U2.3 6.6,23.2 6.1,22.7 6.1,21.85 6.95,21 9.5,21 11.3,22.8 16.5,22.8 16.9,22.4 16.9,18.3 v1(18.3,16.9) 19.68,16.9 R15.1
P5LP12_1: length 48.3
  TOP w0.178: U3.39 18,17.4 v1(18.3,17.7) ; v1(4.7,41.1) 5.3,41.1 5.5,41.3 10.59,41.3 10.9,40.99 U1.20
  BOTTOM w0.178: v1(4.7,41.1) 4.7,40.1 5.3,39.5 5.3,36.6 7.4,34.5 7.4,28.8 8.6,27.6 9.5,27.6 9.8,27.3 9.8,24.2 9.9,24.1 9.9,22.7 9.4,22.2 U2.6 8.88,21.8 9.7,21.8 11.1,23.2 16.6,23.2 17.3,22.5 17.3,18.7 v1(18.3,17.7) 18.98,17.7 R14.1
P5LP12_2: length 50.7
  TOP w0.178: v1(16,33.9) 15.4,34.5 13.2,34.5 11.4,36.3 7.5,36.3 6.8,37 6.8,37.5 v1(5.9,38.4) 6.7,39.2 R26.1 ; CN1.4 3.2,54.7 2.65,54.15 v1(2.65,53.5) ; U3.46 17.9,20.2 v1(18.3,19.8)
  BOTTOM w0.178: v1(2.65,53.5) 3.2,52.95 3.2,51.25 3.9,50.55 3.9,42.7 6.5,40.1 6.5,39 v1(5.9,38.4) ; v1(16,33.9) 15.9,33.8 15.9,28.5 19,25.4 19,24.7 17.7,23.4 17.7,20.4 v1(18.3,19.8)
P5LP12_3: length 53.3
  TOP w0.178: CN1.3 3.2,58.9 3,59.1 2.5,59.1 v1(1.9,58.5) ; U3.47 v1(18.3,20.6) ; v1(6.7,38.4) 7.01,38.4 R12.1 8.71,36.7 11.6,36.7 13.4,34.9 16.1,34.9 v1(16.3,34.7)
  BOTTOM w0.178: v1(6.7,38.4) 6.9,38.6 6.9,40.3 4.3,42.9 4.3,57 2.8,58.5 v1(1.9,58.5) ; v1(16.3,34.7) 16.58,34.42 16.58,33.18 16.3,32.9 16.3,28.7 19.4,25.6 19.4,24.5 18.05,23.15 18.05,20.85 v1(18.3,20.6)
P5LP12_4: length 32.8
  TOP w0.178: 0.63,23.8 2.7,23.8 3.42,24.52 R6.2 ; 0.63,23.8 SW1.1 ; 0.63,23.8 SW1.3 ; U3.3 8.9,21.4 v1(7.9,20.4) ; R6.2 5.32,24.52 5.6,24.8 5.6,29.2 v1(6,29.6) SW3.6 ; R6.2 C21.1
  BOTTOM w0.178: v1(7.9,20.4) 7.01,20.4 5.7,21.71 5.7,23.9 5.3,24.3 5.3,28.5 6,29.2 v1(6,29.6) 6,29.71 R13.1
P5LP12_5: length 35.2
  TOP w0.178: v1(3.7,41.1) 4.3,41.7 10.73,41.7 11.04,41.39 U1.19 ; U3.4 9.1,21 8.7,20.6 v1(8.7,20.4)
  BOTTOM w0.178: v1(3.7,41.1) 3.5,40.9 3.5,37 4.1,36.4 4.1,24.9 5.3,23.7 5.3,21.57 7.07,19.8 8.1,19.8 v1(8.7,20.4)
P5LP12_6: length 60.9
  TOP w0.178: U3.20 11.1,14.2 v1(10.9,14) ; v1(3.5,36) 3.7,36 6.2,33.5 10.4,33.5 11.1,34.2 v1(11.8,34.2) ; v1(2.65,52.3) 4,53.65 CN1.8
  BOTTOM w0.178: v1(10.9,14) 10.7,14.2 5.54,14.2 4.9,14.84 4.9,17.1 5.6,17.8 5.6,20.73 4.9,21.43 4.9,23.4 3.7,24.6 3.7,35.8 v1(3.5,36) 3.1,36.4 3.1,50.8 2.65,51.25 v1(2.65,52.3) ; v1(11.8,34.2) 12.02,34.2 R30.1
P5LP12_7: length 70
  TOP w0.178: U3.21 11.5,13.8 v1(10.9,13.2) ; CN1.7 4,58.9 4.13,59.03 4.67,59.03 5.6,58.1 5.6,57.5 4.9,56.8 v1(3.7,56.8) ; v1(11.4,34.9) 10.78,35.52 4.88,35.52 3.8,36.6 3.3,36.6 v1(2.7,36)
  BOTTOM w0.178: v1(10.9,13.2) 10.3,13.8 5.4,13.8 4.5,14.7 4.5,17.3 5.2,18 5.2,20.59 4.5,21.29 4.5,23.2 3.3,24.4 3.3,35.4 v1(2.7,36) 2.7,50.65 2.1,51.25 2.1,54.3 3.7,55.9 v1(3.7,56.8) ; R29.1 11.5,35 v1(11.4,34.9)
P5LP_DM: length 6.3
  TOP w0.229: R18.1 12.42,9.67 12.42,8.43 D2.1 12.38,7.53 12.38,5.51 J1.2
P5LP_DP: length 6.3
  TOP w0.229: R17.1 11.78,9.77 11.78,8.43 D3.1 11.75,7.6 11.75,5.51 J1.3
P5LP_POWER: length 17.2
  TOP w0.178: U3.16 8.5,16.2 8,16.2
  TOP w0.5: 4.82,4.63 4.8,4.6 v1(4.8,3.3)
  TOP w0.508: 4.82,4.63 7.7,7.5 7.7,15.9 8,16.2
  BOTTOM w0.5: R25.1 4.75,3.25 v1(4.8,3.3)
P5LP_SWDCLK: length 16.1
  TOP w0.178: U3.12 8.3,17.8 6.5,19.6 6.5,22.9 9.9,26.3 9.9,27.2 11.43,28.73 J2.4
P5LP_SWDIO: length 16.9
  TOP w0.178: J2.2 13.44,27.46 13.8,27.1 13.8,26.5 12.1,24.8 9,24.8 6.9,22.7 6.9,19.8 8.5,18.2 U3.11
P5LP_VCCD: length 30.3
  TOP w0.178: v1(14.7,23.8) 14.7,23.6 U3.57 ; 14,14 13.5,14.5 U3.26
  TOP w0.635: 14,14 14.8,13.2 v1(16,13.2)
  POWER w0.635: v1(17.5,11.5) v1(17.5,12.4) 19.6,14.5 19.6,25 18.7,25.9 16.6,25.9 v1(15.5,24.8)
  BOTTOM w0.5: v1(14.7,23.8) 14.7,24.3 14.4,24.6 C26.2 15.44,24.86 v1(15.5,24.8)
  BOTTOM w0.635: v1(16,13.2) C38.1 16.84,11.65 17,11.5 v1(17.5,11.5) v1(17.5,12.4)
P5LP_VDD: length 30.5
  TOP w0.178: C29.1 17.1,23.75 17.1,23.5 16.7,23.1 U3.52 ; v1(10.8,23.8) 10.7,23.7 U3.67 ; U3.44 17.9,19.4 18.2,19.1 C32.1 ; v1(8.5,15.6) 8.7,15.8 U3.17 ; U3.24 12.7,14.5 v1(13.2,14) ; U3.35 18.1,15.8 18.3,16 C36.1 ; v1(13.9,23.8) 13.9,23.6 U3.59
  TOP w0.5: C36.1 18.95,15.35 v2(18.7,15.1) ; C29.1 17.45,24.95 v1(17.6,25.1) ; C33.1 19.55,20.21 C32.1
  TOP w0.635: v2(17.8,15.1) v2(18.7,15.1) ; v2(18.7,21.5) 19,21.5 19.36,21.14 C33.1
  BOTTOM w0.5: v1(7.2,16.6) 7.46,16.34 C35.1 8.4,15.7 v1(8.5,15.6) ; v1(13.9,23.8) 13.4,23.8 13.1,24.1 13.1,24.64 12.02,24.64 C24.1 11.59,24.64 10.5,24.64 10.5,24.3 10.8,24 v1(10.8,23.8)
  BOTTOM w0.635: v1(7.2,16.6) 7.2,17.59 R16.1 ; v1(13.2,14) 13,13.8 13,11.76 C41.1 14.41,11.65 C40.1 14.5,12.2 v1(13.9,12.8) ; C24.1 v1(11.8,23.8)
P5LP_XRES: length 23.9
  TOP w0.178: J2.10 14,32.54 14.2,32.34 14.2,26.3 12.3,24.4 9.2,24.4 7.3,22.5 7.3,20 8.5,18.8 v1(8.7,18.8) 8.9,18.6 U3.10
  BOTTOM w0.178: R16.2 8.79,18.71 v1(8.7,18.8) 9.35,18.8 C37.1
SCL: length 26.4
  TOP w0.178: v1(22.5,40.5) 21.61,41.39 19.38,41.39
  BOTTOM w0.178: v1(22.5,40.5) 23.4,39.6 23.4,29 20.2,25.8 20.2,24.1 20,23.9 20,20.79 R15.2
SDA: length 25.2
  TOP w0.178: v1(22.5,39.7) 21.21,40.99 19.38,40.99
  BOTTOM w0.178: v1(22.5,39.7) 23,39.2 23,29.2 19.8,26 19.8,24.3 19.6,24.1 19.6,19.89 R14.2
SWDCLK: length 3.4
  TOP w0.178: U1.27 9.77,38.19 R12.2
SWDIO: length 3.4
  TOP w0.178: U1.26 9.9,38.59 R26.2
VREF: length 1.8
  TOP w0.178: C13.1 20.76,37.74 19.91,38.59 19.38,38.59
VTARG: length 53.9
  TOP w0.635: J2.1 18.36,27.46 v1(18.5,27.6) ; v1(4.5,19.3) v1(4.5,20.1) 5,20.1 5.8,20.9 5.8,23.7 6.4,24.3 v1(6.4,27.3) v1(6.4,28.1)
  POWER w0.635: v1(18.5,27.6) 10.5,27.6 v1(9.8,28.3) v1(8.9,28.3) 6.6,28.3 v1(6.4,28.1) v1(6.4,27.3)
  BOTTOM w0.635: R10.1 R9.1 6.4,26.89 v1(6.4,27.3) v1(6.4,28.1) ; R20.1 10,9.1 9.1,8.2 6.5,8.2 6,8.7 6,9.3 4.5,10.8 4.5,13.8 3.89,14.41 3.89,18.69 v1(4.5,19.3) v1(4.5,20.1) ; TVS1.1 14.34,29.55 C42.1 13.02,29.06 R11.1 10.56,29.06 v1(9.8,28.3) v1(8.9,28.3)
XRES: length 4.1
  TOP w0.178: v1(5,33.3) 5,33.8 4.2,34.6 SW3.1
  BOTTOM w0.178: R13.2 v1(5,33.3)
XTAL24I: length 7.3
  TOP w0.178: U1.16 12.01,42.59 11.6,43 11.6,43.9 11.85,44.15 11.85,44.95 11.4,45.4 9,45.4 8.75,45.15 Y2.3
XTAL24O: length 2.6
  TOP w0.178: U1.17 11.81,42.19 11.35,42.65 Y2.1
XTAL32I: length 6.4
  TOP w0.178: C22.1 19.8,46.24 v1(19.8,45.4) 19.6,45.4 19.2,45.8 18.3,45.8 17.72,45.22 U1.3
  BOTTOM w0.178: Y1.1 19.7,45.3 v1(19.8,45.4)
XTAL32O: length 7.9
  TOP w0.178: U1.2 18.12,45.04 18.48,45.4 19,45.4 19.6,44.8 20,44.8 v1(20.6,45.4) 20.6,46.15 C23.1
  BOTTOM w0.178: Y1.2 22.3,44.3 21.8,44.8 21.2,44.8 v1(20.6,45.4)
N16838351: length 2.5
  TOP w0.178: LED1.2 22.3,34.15 R7.2
N16850094: length 2.9
  TOP w0.457: LED2.2 20.57,1.83 v1(20.6,1.8)
  BOTTOM w0.457: v1(20.6,1.8) 20.46,1.94 R22.2
N16852479: length 3.5
  TOP w0.5: v1(2.2,1.8) 1.9,1.8 1.61,2.09
  TOP w0.508: LED3.2 1.61,2.09
  BOTTOM w0.5: v1(2.2,1.8) 1.66,2.34 R25.2
N16886366: length 2.3
  TOP w0.178: C34.1 18.56,18.6 U3.42
N16934357: length 0.5
  TOP w0.203: 14.12,44.37 14.12,44.37 U1.12
N16992889: length 3.1
  TOP w0.178: CN1.10 4.4,54.4 4.7,54.1 D4.1
N168501551: length 3.4
  BOTTOM w0.178: U2.1 7.6,22.2 7.8,22.4 7.8,23.91 R9.2
N168501631: length 1.5
  BOTTOM w0.178: U2.4 8.48,24.69 R10.2

## Copper pours and planes (outline as drawn; the poured copper is in the pictures)
GND_SIGNAL on TOP (solid shape): 21.25,52.84 13.89,52.84 13.89,53.35 21.25,53.35
GND_SIGNAL on TOP (solid shape): 14.33,51.05 14.33,48.08 13.92,48.08 13.92,51.05 13.88,51.89 14.39,51.89
GND_SIGNAL on TOP (solid shape): 15.4,43.3 15.5,43.2 18.7,43.2 18.7,42.8 18.8,42.7 18.95,42.7 19.01,42.68 19.08,42.67 19.6,42.67 19.6,42.5 18.8,42.5 18.7,42.4 18.7,37.6 13.1,37.6 13.1,43.2 15.1,43.2 15.2,43.3 15.2,43.4 15.23,43.47 15.24,43.55 15.24,44.04 15.3,44.1 15.4,44.1
GND_SIGNAL on TOP (solid shape): 15.53,55.19 16.17,55.19 16.17,59 17.82,59 17.82,55.19 18.45,55.19 18.45,59 20.1,59 20.1,55.19 20.74,55.19 20.74,59 21.25,59 21.25,54.68 19.59,54.68 19.59,58.49 18.96,58.49 18.96,54.68 17.31,54.68 17.31,58.49 16.67,58.49 16.67,54.68 15.02,54.68 15.02,58.49 14.39,58.49 14.39,51.88 13.88,51.88 13.88,59 15.53,59
GND_SIGNAL on TOP (solid shape): outline of 88 points within 14.74,30.4 23.5,52.1
GND_SIGNAL on TOP (solid shape): outline of 92 points within 9.3,14.8 17.7,23.2
GND_SIGNAL on TOP (solid shape): outline of 201 points within 0.5,1.4 7.2,22.7
GND_SIGNAL on TOP (solid shape): outline of 221 points within 0.5,25.6 13.49,59
GND_SIGNAL on TOP (solid shape): outline of 706 points within 7,0.5 23.5,32.9
GND_SIGNAL on BOTTOM (solid shape): 17.5,34 17.6,33.9 18.9,33.9 18.9,31.8 19.7,31 19.7,29.6 20.3,29 20.3,28.2 20.2,28.1 18.61,28.1 18.57,28.11 18.5,28.11 18.43,28.11 18.39,28.1 17.32,28.1 16.9,28.52 16.9,32.8 18.2,32.8 18.2,33.1 17.9,33.1 17.9,32.8 16.9,32.8 16.9,34.4 17.5,34.4
GND_SIGNAL on BOTTOM (solid shape): 18.71,25.28 18.71,24.89 18.7,24.9 18.6,24.8 18.2,24.8 18.1,24.9 18.1,24.99 18.11,25.03 18.11,25.09 18.11,25.15 18.1,25.22 18.08,25.28 18.05,25.33 18.02,25.39 17.98,25.44 17.94,25.48 17.89,25.52 17.86,25.54 17.5,25.9 13.5,25.9 13.4,25.8 13.4,25.3 12.8,25.3 12.8,25.8 12.7,25.9 10.9,25.9 10.8,25.8 10.8,25.3 10.2,25.3 10.2,26.7 16.3,26.7 16.3,27 15.9,27 15.9,26.7 15.1,26.7 15.1,27 14.7,27 14.7,26.7 14.1,26.7 14.1,27 13.7,27 13.7,26.7 12.5,26.7 12.5,27 12.1,27 12.1,26.7 11.5,26.7 11.5,27 11.1,27 11.1,26.7 10.2,26.7 10.2,27.5 10.69,27.99 15.99,27.99
GND_SIGNAL on BOTTOM (solid shape): outline of 1402 points within 0.5,3.3 23.5,59.5
GND_SIGNAL on GND (solid shape): outline of 5775 points within 0.6,0.6 23.4,59.5
GND_SIGNAL on POWER (solid shape): 16,21.2 16,16.8 15.7,16.5 11.3,16.5 11,16.8 11,21.2 11.3,21.5 15.7,21.5
GND_SIGNAL on POWER (solid shape): outline of 236 points within 4.7,34.2 18.8,42.8
GND_SIGNAL on POWER (solid shape): outline of 424 points within 0.5,16.2 23.4,59.5
GND_SIGNAL on POWER (solid shape): outline of 1034 points within 0.6,0.5 23.4,37.1
VBUS on TOP (solid shape): 23,12.8 23,11.1 22.7,10.8 21.6,10.8 21.4,10.6 19.9,10.6 19.9,10.8 20.8,10.8 20.8,11.2 20.6,11.2 20.6,10.8 20.4,10.8 20.4,11.2 20.1,11.2 20.1,10.8 19.9,10.8 19.9,11.3 20.1,11.5 22.6,11.5 22.6,11.8 22.3,11.8 22.3,11.5 21.7,11.5 21.7,11.8 21.4,11.8 21.4,11.5 20.1,11.5 21.6,13 22.8,13
VBUS on BOTTOM (solid shape): 23.4,13.3 23.4,10.2 23.3,10.1 18.9,10.1 18.9,11.4 22.3,11.4 22.3,11.8 21.9,11.8 21.9,11.4 18.9,11.4 18.9,11.6 19,11.7 20.1,11.7 20.2,11.8 20.2,11.9 21.4,11.9 21.4,12.2 21.1,12.2 21.1,11.9 20.2,11.9 20.2,13.4 20.3,13.5 23.2,13.5
VBUS on POWER (solid shape): outline of 177 points within 2.3,6.2 23.5,12.9
VDDA on BOTTOM (solid shape): 21.1,35.38 21.02,35.1 21.1,34.82 21.1,32 21,31.9 19.6,31.9 19.5,32 19.5,34.3 19.3,34.5 18.1,34.5 18.1,35.5 18.2,35.6 20,35.6 20.1,35.7 20.1,36.9 20.2,37 21.1,37
VDDD on BOTTOM (solid shape): 10.48,35.12 10.48,33.77 10.5,33.75 10.5,33.2 10.17,32.87 10,32.68 9.93,32.43 9.4,31.9 8.5,31.9 8.5,35.1 8.6,35.2 10.4,35.2
VDDD on POWER (solid shape): outline of 321 points within 5.7,31.7 22,46.7
VDDR on TOP (solid shape): 8.4,46.4 8.4,45.3 8.3,45.2 7.3,45.2 6.7,44.6 4.1,44.6 4.1,46.4 4.2,46.5 8.3,46.5
VDDR on POWER (solid shape): outline of 369 points within 7,41 18.8,46.8
EZ_VDD on TOP (solid shape): 6.9,43.7 6.9,42.6 6.8,42.5 4.2,42.5 4.1,42.6 4.1,43.8 6.8,43.8
P5LP_VDD on BOTTOM (solid shape): 19.2,15.2 19.2,12.2 18.5,12.2 17.5,13.2 17.5,15.2 17.7,15.4 19,15.4
P5LP_VDD on POWER (solid shape): outline of 396 points within 6.9,12.5 19,25.3
N16851895 on BOTTOM (solid shape): outline of 89 points within 14.8,4.1 22.1,8.4
N16934357 on TOP (solid shape): 14.33,46.12 14.22,44.32 14.02,44.32 13.92,46.12 13.92,47.78 14.33,47.78
GND_SIGNAL on TOP (solid shape): 8.25,5.97 8.56,6.29 8.88,5.97 8.88,4.83 8.56,4.51 8.25,4.83
GND_SIGNAL on TOP (solid shape): 8.25,4.83 8.56,5.15 8.88,4.83 8.88,3.69 8.56,3.37 8.25,3.69
GND_SIGNAL on TOP (solid shape): 8.56,5.15 8.88,4.83 8.56,4.51 7.42,4.51 7.1,4.83 7.42,5.15
GND_SIGNAL on TOP (solid shape): 9.71,5.15 10.02,4.83 9.71,4.51 8.56,4.51 8.25,4.83 8.56,5.15
GND_SIGNAL on BOTTOM (solid shape): 8.25,5.97 8.56,6.29 8.88,5.97 8.88,4.83 8.56,4.51 8.25,4.83
GND_SIGNAL on BOTTOM (solid shape): 8.25,4.83 8.56,5.15 8.88,4.83 8.88,3.69 8.56,3.37 8.25,3.69
GND_SIGNAL on BOTTOM (solid shape): 8.56,5.15 8.88,4.83 8.56,4.51 7.42,4.51 7.1,4.83 7.42,5.15
GND_SIGNAL on BOTTOM (solid shape): 9.71,5.15 10.02,4.83 9.71,4.51 8.56,4.51 8.25,4.83 8.56,5.15

Small or netless copper shapes (teardrops, artwork), in the pictures only: 80 on TOP, 65 on BOTTOM

## Text on the board
BOTTOM: L | 4
Ref Des/Assembly Bottom: SECONDARY SIDE
Ref Des/Silkscreen Bottom: 4 | GND | . | VBUS | P0 | LED1 | VDDD | VDDR | R | SW2 | P3.3 | P2.6 | 0 | 1 | P3 | P5LP_P15.4 | 3.3V | VDDA
User.Comments: CYPRESS | 07/21/14 | PRAO | RKPM | SEMICONDUCTOR | 198 CHAMPION COURT | SAN JOSE, CA 95134 | (408) 943-2600 | 03/11/14 | BETA RELAEASE | ALPHA RELEASE | 02 | 01 | C
TOP: L | 1
Ref Des/Assembly Top: PRIMARY SIDE
Ref Des/Silkscreen Top: EZ-BLE | PRoC BLE | 3 | RESET | GND | VBUS | 4 | 17 | 6 | 18 | 68 | 28 | 15 | 14 | Debug Board | 1 | 5 | 51 | 10 | 3.3V | POWER | PSoC 5LP | USER | STATUS | 2 | 9 | PROG
GND: 2
POWER: 3
DIMENSION: NOTE: 9 MIL WIDTH & 16 MIL SPACING TRACES ON LAYER 4 IS  DIFFERENTIAL | IMPEDANCE CONTROLLED TO 90 OHMS +/- 10% TESTED | FABRICATION DRAWING | BLE DONGLE | (PREFERRED) OR SILKSCREEN. | 1. RoHS COMPLIANT CERTIFICATION OR MATERIAL DECLARATION REQUIRED | 2. MATERIAL: | A. IS410 OR EQUIVALENT. MATERIAL MUST CONFORM TO UL94V-0. | B. USE HTE COPPER, AS SPECIFIED IN THE CROSS SECTION DIAGRAM | 3. DRILLING: | A. DIAMETERS IN DRILL TABLE ARE FINISHED HOLE SIZES +/-.003 tol. | UNLESS OTHERWISE SPECIFIED IN DRILL TABLE. | B. TEARDROP ALLOWED ON ENTRY OF VIA ON EVERY TRACE LAYER. | 4. PLATING: | COPPER PLATING IN THRU-HOLES .001 min. | 5. MARKING: | A. SILKSCREEN IN WHITE NON-CONDUCTIVE EPOXY INK ON PRIMARY SIDE OF THE | BOARD OR BOTH SIDES IF APPLICABLE. | B. FABRICATOR TO PLACE DATE CODE AND LOGO ON SECONDARY SIDE IN ETCH | 6. FINAL FABRICATION: | A. SOLDRMASK PRIMARY AND SECONDARY SIDE OF BOARD USING LIQUID PHOTOIMAGABLE | MASK MATERIAL OVER BARE COPPER. PER IPC-SM-840. MASK ARTWORKS PROVIDED | ARE 1:1. SOLDERMASK COLOR **BLACK** | 7. FINISH: | A. SHALL BE ELECTROLYTIC NICKEL/GOLD. ELECTROLESS NIKEL / IMMERSION GOLD. (ENIG) | B. NICKEL THICKNESS: 100-200 MICROINCHES. | C. GOLD THICKNESS: 3-10 MICROINCHES. | 8. BOARDS SHALL BE PURCHASED FROM UL RECOGNIZED VENDORS ONLY AND SHALL BE | MARKED IN COPPER ON SECONDARY SIDE OF BOARD WITH VENDORS UL IDENT. | FLAMABILITY RATING (94-V0), DATE CODE (WWYY), AND RoHS COMPILANT SYMBOL. | 9. MANUFACTURE BOARD TO BE IN ACCORDANCE WITH PERFORMANCE STANDARD | IPC-6011/6012 CLASS 2 BOARD TO BE INSPECTED PER IPC-600-A CLASS 2. | 10.MAXIMUM WRAP OR TWIST SHALL NOT EXCEED .007 in/in. | 11.TESTING: | A. FABRICATOR TO ADD TEST STRUCTURES OR CUPONS AS NEEDED. | B. T-LINE IMPEDENCE TO BE TESTED OR GUARANTEE WITHIN 10% IF SPECIFIED IN | C. OVERALL METAL TO METAL THICKNESS AS SPECIFIED IN THE CROSS SECTION | THE CROSS SECTION.  TOLERANCE TO BE +/-10% UNLESS OTHERWISE SPECIFIED. | 1 OF 1 | NOTES:(UNLESS OTHERWISE SPECIFIED) | 610-60189-01
PAGE_OUTLINE: REV
DISPLAY_BOTTOM: CYPRESS | REV | SEMICONDUCTOR | 198 CHAMPION COURT | SAN JOSE, CA 95134 | (408) 943-2600 | 02 | C
User.11: FIGURE | SIZE | 0.203 | 0.254 | 0.61 | 1.016 | 1.092 | 1.25 | 2.6x1.05 | DRILL CHART: TOP to BOTTOM | ALL UNITS ARE IN MILLIMETERS | TOLERANCE | +0.051/-0.051 | +0.076/-0.254 | +0.0/-0.0 | +0.076/-0.076 | PLATED | NON-PLATED | QTY | 103 | 221 | 4 | 3 | 2
